# Altium PCB PCB_STM32F103C8T6.PcbDoc
Units mil, origin at the board's own origin, x right, y up, seen from the top; angles counter-clockwise.
Board outline 1250.01 x 2100.03 mil, 2 copper layers (Top Layer, Bottom Layer); 35 components, 52 nets, 165 pads, 35 vias.
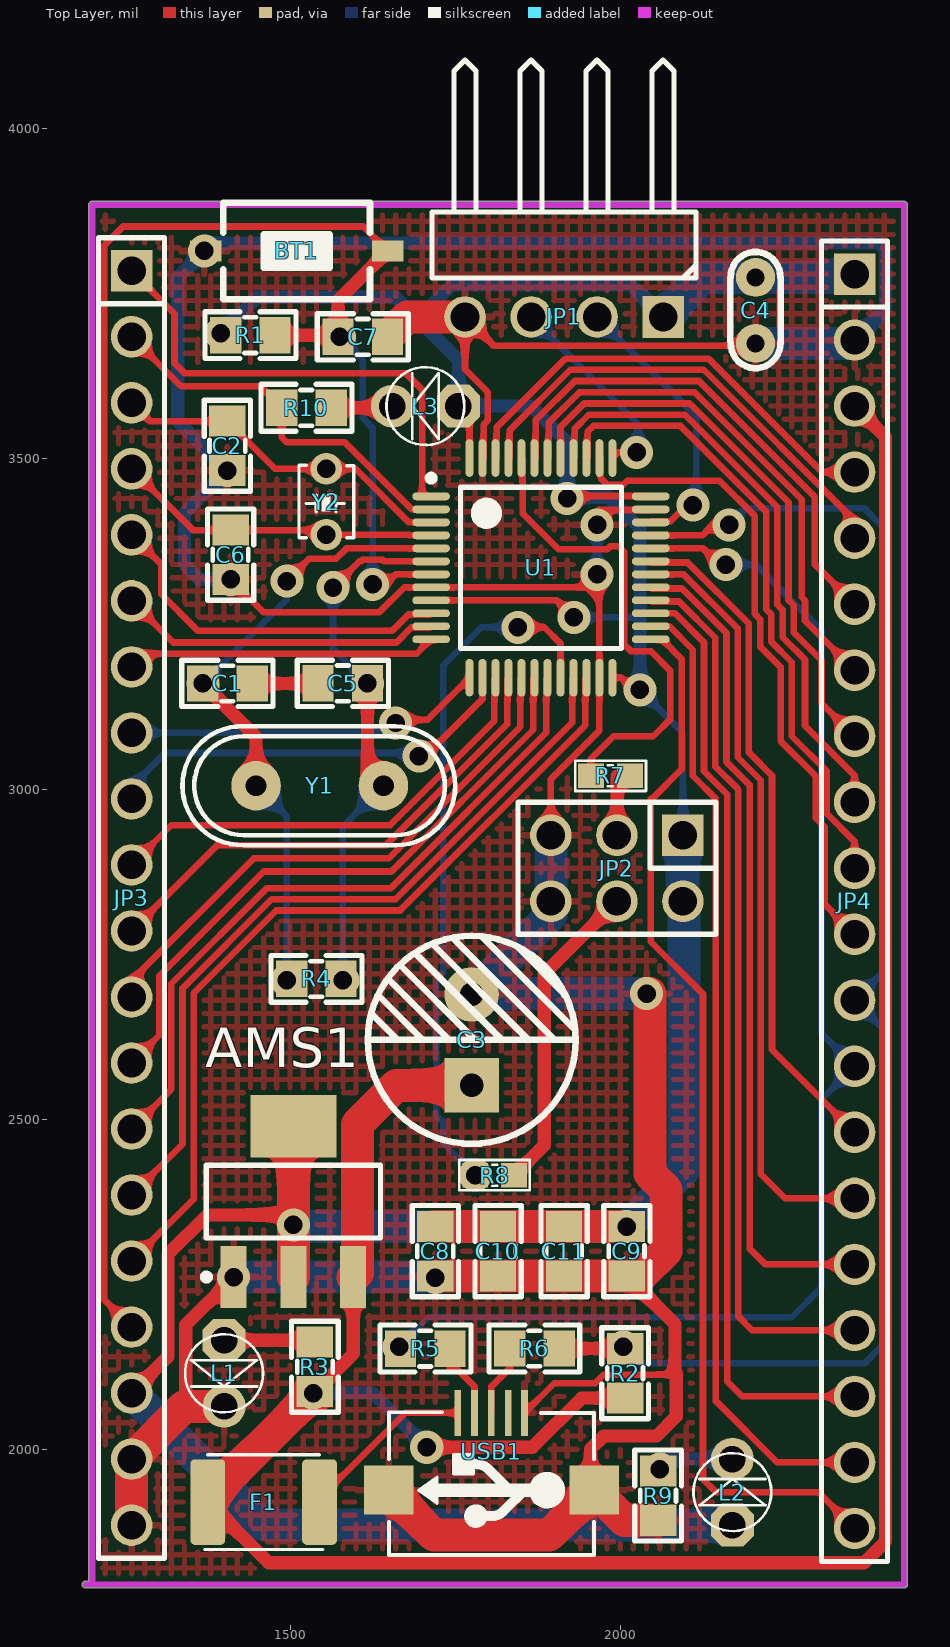
[diagram p0: Top Layer view]
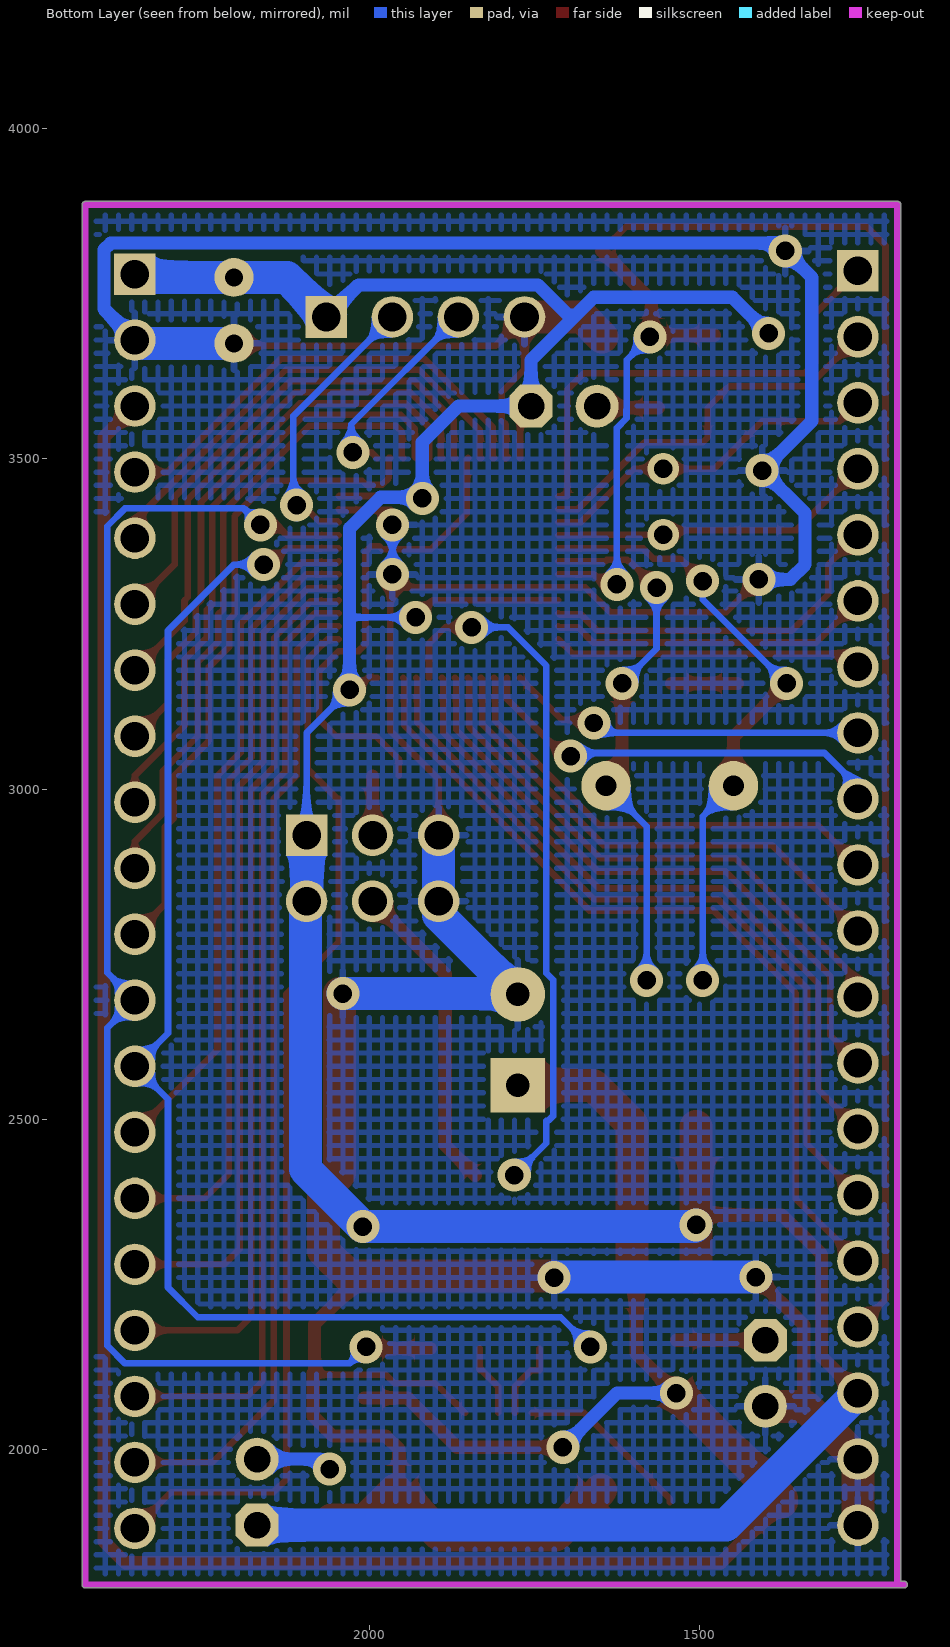
[diagram p1: Bottom Layer view, seen from below]
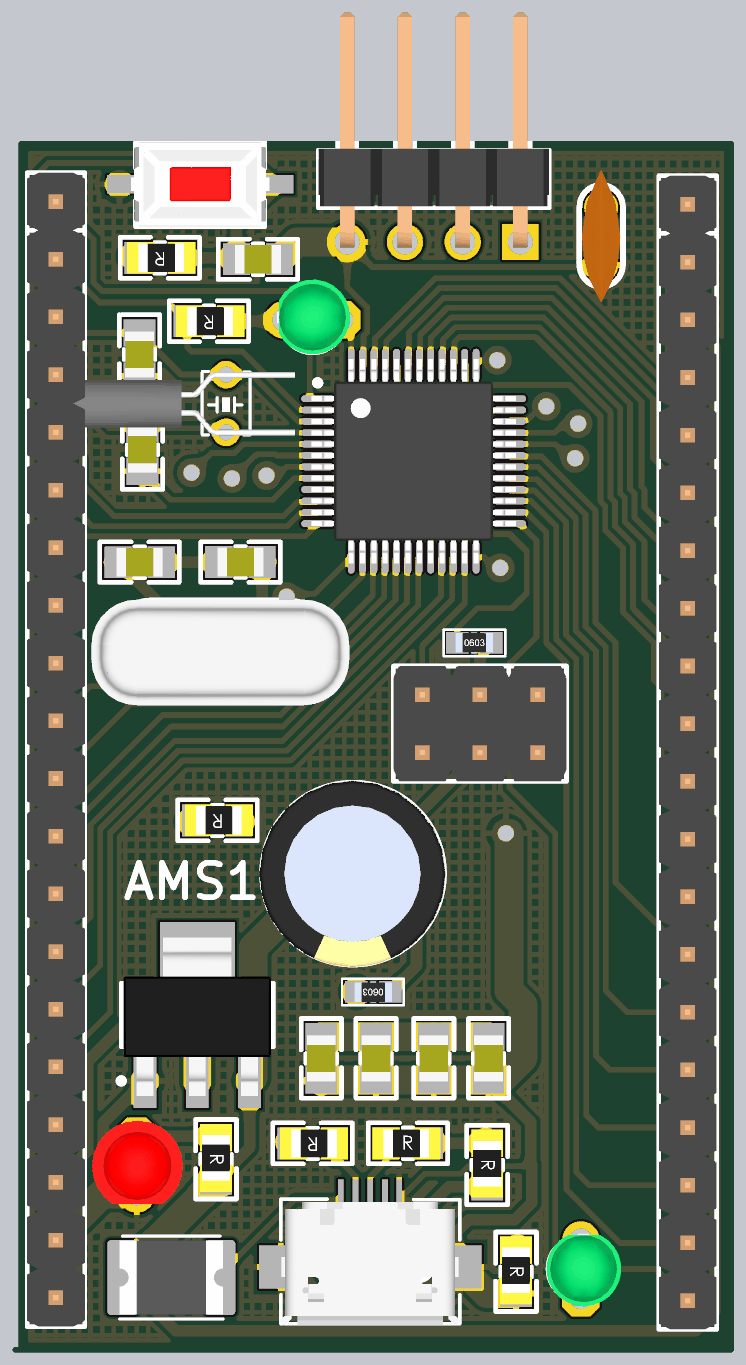
[diagram p2: 3D render of the assembled board from above, using the file's embedded part models]

## Layer stack, top to bottom
Top Solder: solder mask 0.4, Solder Resist, Dk 3.5
Top Layer: signal copper 1.4
Dielectric 1: dielectric 12.6, FR-4, Dk 4.8
Bottom Layer: signal copper 1.4
Bottom Solder: solder mask 0.4, Solder Resist, Dk 3.5

## Board outline
1190,1789.98 cw(c1190,1795) 1190,1800.02 1194.98,1800.02 1194.98,3885 cw(c1200,3885) 1200,3890.01 2430,3890.01 cw(c2430,3885) 2435.01,3885 2435.01,1795 cw(c2430,1795) 2430,1789.98

## Design rules (kind name [scope] priority, off if disabled: settings)
Clearance [All] p1: gap=7
DiffPairsRouting [All] p1: maxlimit=10 minlimit=10 mostfreqgap=10 toplayer_minwidth=10 toplayer_maxwidth=50 toplayer_prefwidth=20 bottomlayer_minwidth=10 bottomlayer_maxwidth=50 bottomlayer_prefwidth=20 maxuncoupledlength=500
PolygonConnect [All] p1: connectstyle=Relief reliefconductorwidth=10 reliefentries=4 polygonreliefangle="90 Angle" airgapwidth=10
RoutingVias [All] p1: holewidth=28 width=50 viastyle="Through Hole" minholewidth=28 minwidth=50 maxholewidth=28 maxwidth=50
SolderMaskExpansion [All] p1: expansion=4
Width [All] p1: maxlimit=50 minlimit=10 preferedwidth=20
29 further rules are at their usual default settings.

## Components (designator, comment, footprint, x,y, rotation, side; value= is the part's Value field where it differs from the comment)
AMS1 "AMS1117-3.3V" SOT223 1505,2375 r0 top
BT1 "Nut Nhan 2 Chan SMD 3x6x2.5" "Nut Nhan 2 Chan SMD 3x6x2.5" 1510,3815 r0 top
C1 "22pF" "tu 0805" 1405,3160 r0 top
C2 "22pF" "tu 0805" 1405,3520 r270 top
C3 "470uF" "tu hoa 8mm" 1775,2620 r90 top
C4 "104" "tu gom" 2205,3725 r270 top
C5 "22pF" "tu 0805" 1580,3160 r180 top
C6 "22pF" "tu 0805" 1410,3355 r270 top
C7 "104" "tu 0805" 1610,3685 r0 top
C8 "104" "tu 0805" 1720,2300 r270 top
C9 "104" "tu 0805" 2010,2300 r270 top
C10 "104" "tu 0805" 1815,2300 r270 top
C11 "104" "tu 0805" 1915,2300 r270 top
F1 "2A 24V" "Cau chi tu phuc hoi 2A 24V SMD1812" 1460,1920 r180 top
JP1 "JP 1x4 2.54" "JP 1x4 DC" 1715,3815 r180 top
JP2 "JP 2x3 2.54" "JP 2x3 DT" 1995,2880 r180 top
JP3 "JP 1x20 2.54" "JP 1x20 DT" 1260,3785 r270 top
JP4 "JP 1x20 2.54" "JP 1x20 DT" 2355,3780 r270 top
L1 "LED 3mm" LED-3MM-RED 1400,2165 r270 top
L2 "LED 3mm" LED-3MM-GREEN 2170,1885 r90 top
L3 "LED 3mm" LED-3MM-GREEN 1755,3580 r180 top
R1 "10k" "tro smd 0805" 1440,3685 r180 top
R2 "1.5k" "tro smd 0805" 2010,2115 r270 top
R3 "220R" "tro smd 0805" 1540,2125 r270 top
R4 "1M" "tro smd 0805" 1540,2710 r180 top
R5 "22R" "tro smd 0805" 1705,2150 r180 top
R6 "22R" "tro smd 0805" 1870,2155 r0 top
R7 "100k" "tro smd 0603" 1985,3020 r0 top
R8 "100k" "tro smd 0603" 1810,2415 r180 top
R9 "100R" "tro smd 0805" 2060,1930 r270 top
R10 "100R" "tro smd 0805" 1525,3575 r180 top
U1 "STM32F103xx_LQFP48" STM32_LQPF48 1880,3335 r0 top
USB1 "USB Micro 5p SMD" "USB Micro 5p SMD" 1805,2055 r180 top
Y1 "16Mhz" "Thach Anh 2 chan cam" 1545,3005 r0 top
Y2 "16Mhz" "Thach Anh 2 Chan 32,768 KHz" 1555,3385 r180 top

## Footprints (in the part's own frame and the unit in brackets; to place one, negate y for a bottom-side part, rotate by r counter-clockwise, add the part's x,y. Pads: shape width x height; smd on the part's side, far side on the other; paste and mask are expansions set on the pad)
"Cau chi tu phuc hoi 2A 24V SMD1812" [mm]
  rrect25% 1.34x3.29 smd: 1(-2.15,0) 2(2.15,0)
  silkscreen extent -2.28,-1.83 2.28,1.83, body extent -2.27,-1.62 2.27,1.62, height 1.25
"JP 1x4 DC" [mm] "4 pins, 1 row, right angled, gold plating"
  rect 1.6x1.6 hole 1.1: 1(-8.89,2.54)
  round 1.6 hole 1.1: 2(-6.35,2.54) 3(-3.81,2.54) 4(-1.27,2.54)
  silkscreen extent -10.16,-7.34 0,1.04, body extent -10.16,-7.57 0,2.79, height 2.54
"JP 1x20 DT" [mm] "20 pins, 1 row, straight, gold plating"
  rect 1.6x1.6 hole 1.1: 1(0,0)
  round 1.6 hole 1.1: 2(2.54,0) 3(5.08,0) 4(7.62,0) 5(10.16,0) 6(12.7,0) 7(15.24,0) 8(17.78,0) 9(20.32,0) 10(22.86,0) 11(25.4,0) 12(27.94,0) 13(30.48,0) 14(33.02,0) 15(35.56,0) 16(38.1,0) 17(40.64,0) 18(43.18,0) 19(45.72,0) 20(48.26,0)
  silkscreen extent -1.27,-1.27 49.53,1.27, body extent -1.27,-1.27 49.53,1.27, height 8.54
"JP 2x3 DT" [mm]
  rect 1.6x1.6 hole 1.1: 1(-2.54,-1.27)
  round 1.6 hole 1.1: 2(0,-1.27) 3(2.54,-1.27) 4(2.54,1.27) 5(0,1.27) 6(-2.54,1.27)
  silkscreen extent -3.81,-2.54 3.81,2.54, body extent -3.81,-2.54 3.81,2.54, height 8.55
LED-3MM-GREEN [mil]
  oct 65x65 hole 40: 1(0,0)
  round 65 hole 40: 2(100,0)
  silkscreen extent -9,-59 109,59, body extent -15,-70 112,60, height 182
LED-3MM-RED [mil]
  oct 65x65 hole 40: 1(0,0)
  round 65 hole 40: 2(100,0)
  silkscreen extent -9,-59 109,59, body extent -27,-77 117,80, height 181
"Nut Nhan 2 Chan SMD 3x6x2.5" [mm] "Switch SMD type"
  rect 1.2x0.8 smd: 1(-3.5,0) 2(3.5,0)
  silkscreen extent -2.82,-1.85 2.82,1.85, body extent -3.05,-1.85 3.05,1.85, height 2.5
SOT223 [mm]
  rect 1x2.4 smd: 1(-2.3,-2.9) 2(0,-2.9) 3(2.3,-2.9)
  rect 3.3x2.4 smd: 4(0,2.9)
  silkscreen extent -3.47,-3.02 3.35,1.4, body extent -3.25,-3.56 3.25,3.4, height 1.68
STM32_LQPF48 [mm]
  oval 1.45x0.3 smd: 1(-4.225,2.75) 2(-4.225,2.25) 3(-4.225,1.75) 4(-4.225,1.25) 5(-4.225,0.75) 6(-4.225,0.25) 7(-4.225,-0.25) 8(-4.225,-0.75) 9(-4.225,-1.25) 10(-4.225,-1.75) 11(-4.225,-2.25) 12(-4.225,-2.75) 25(4.225,-2.75) 26(4.225,-2.25) 27(4.225,-1.75) 28(4.225,-1.25) 29(4.225,-0.75) 30(4.225,-0.25) 31(4.225,0.25) 32(4.225,0.75) 33(4.225,1.25) 34(4.225,1.75) 35(4.225,2.25) 36(4.225,2.75)
  oval 0.3x1.45 smd: 13(-2.75,-4.225) 14(-2.25,-4.225) 15(-1.75,-4.225) 16(-1.25,-4.225) 17(-0.75,-4.225) 18(-0.25,-4.225) 19(0.25,-4.225) 20(0.75,-4.225) 21(1.25,-4.225) 22(1.75,-4.225) 23(2.25,-4.225) 24(2.75,-4.225) 37(2.75,4.225) 38(2.25,4.225) 39(1.75,4.225) 40(1.25,4.225) 41(0.75,4.225) 42(0.25,4.225) 43(-0.25,4.225) 44(-0.75,4.225) 45(-1.25,4.225) 46(-1.75,4.225) 47(-2.25,4.225) 48(-2.75,4.225)
  silkscreen extent -4.35,-3.1 3.1,3.57, body extent -4.5,-4.5 4.5,4.5, height 1.6
"Thach Anh 2 Chan 32,768 KHz" [mil]
  round 48 hole 28: 1(0,0) 2(0,-100)
  silkscreen extent -42,-106 42,5, body extent -120,-105 321,6, height 66
"Thach Anh 2 chan cam" [mm]
  round 1.905 hole 0.8: 1(-2.45,0) 2(2.45,0)
  silkscreen extent -5.28,-2.29 5.21,2.29, body extent -5.68,-2.36 5.68,2.29, height 3.5
"tro smd 0603" [mm] "Chip Capacitor, 2-Leads, Body 1,60x0,80mm, IPC Medium Density"
  rect 1x0.95 smd mask+0.076: 1(-0.75,0) 2(0.75,0)
  silkscreen extent -1.35,-0.58 1.37,0.58, body extent -0.82,-0.42 0.82,0.43, height 0.44
"tro smd 0805" [mm]
  rect 1.2x1.4 smd: 1(-0.946,-0.061) 2(0.954,-0.061)
  silkscreen extent -1.75,-0.97 1.75,0.84, body extent -1.56,-0.76 1.44,0.64, height 0.53
"tu 0805" [mm] "Compoment SMD 80x50mil"
  rect 1.2x1.4 smd: 1(-0.946,-0.003) 2(0.954,-0.003)
  silkscreen extent -1.75,-0.89 1.75,0.89, body extent -1.01,-0.64 1.01,0.63, height 0.61
"tu gom" [mm] "Tu gom mini"
  round 1.5 hole 0.7: 1(-1.27,0) 2(1.27,0)
  silkscreen extent -2.25,-0.97 2.22,0.97, body extent -2.92,-0.85 2.92,0.85, height 6.12
"tu hoa 8mm" [mm]
  rect 2.1x2.1 hole 0.9: 1(-1.75,0)
  round 2.1 hole 0.9: 2(1.75,0)
  silkscreen extent -4,-4 4,4, body extent -4.1,-4.07 4.1,4.13, height 13.81
"USB Micro 5p SMD" [mil]
  rect 10x70 smd: 1(51.18,0) 2(25.59,0) 3(0,0) 4(-25.59,0) 5(-50,0)
  rect 74.8x74.8 smd: 5(-155.51,116.84) 5(155.51,116.84)
  silkscreen extent -155,-1 155,215, body extent -157,5 158,218, height 107

## Part data
AMS1: library part "AMS1117 SMD", "Dán"
C1 C2 C5 C6: library part "Tu 0805 22pF 50V 10%", "Dán"
C3: library part "Tu Hoa 470uF 16V 8x11", "C?m"
C4: library part "Tu gom 104 50V", "C?m"
C7 C8 C9 C10 C11: library part "Tu 0805 104 50V 10%", "Dán"
F1: library part "Cau chi tu phuc hoi 2A 24V SMD1812", "2A 24V SMD1812"
JP1: library part "JP 1x4 2.54 Duc Cong", "C?m"
JP2: library part "JP 2x3 2.54 Duc Thang", "C?m"
JP3 JP4: library part "JP 1x20 2.54 Duc Thang", "C?m"
L1: library part "LED 3mm Do", "C?m"
L2 L3: library part "LED 3mm Xanh La", "C?m"
R1: library part "Tro 0805 1% 10k", "Dán"
R2: library part "Tro 0805 5% 1.5k", "Dán"
R3: library part "Tro 0805 5% 220R", "Dán"
R4: library part "Tro 0805 5% 1M", "Dán"
R5 R6: library part "Tro 0805 5% 22R", "Dán"
R7 R8: library part "Tro 0603 5% 100k", "Dán"
R9 R10: library part "Tro 0805 5% 100R", "Dán"
USB1: "USB Type B"
Y1: library part "Thach Anh 2 chan Cam", "Crystal For all Crystal 2pin."
Y2: library part "Thach Anh 2 chan 32,768 Khz", "Crystal For all Crystal 2pin."

## Via types
v1: diameter 50, hole 28, Top Layer to Bottom Layer, tented both sides, 35 vias

## Nets (pads, with @x,y where several pads share a name; then routed paths per layer and width w, separated by ;. In a path a pad name is that pad's centre, name@x,y a point inside that pad or via, vN(x,y) a via of type N, cw(c..) or ccw(c..) an arc to the next point about the centre after c; other vN are vias at no path point)
5V: AMS1.3 C3.1 F1.2 JP4.3 R2.2 R3.2 | length 4214.5
  Top Layer w20: F1.2 1467.35,1828 2369.36,1828 2401.92,1860.56 2401.92,3533.08 JP4.3 ; R3.2 1538.03,2087.43 1595.55,2144.95 AMS1.3 ; v1(1707,2003) 1867.04,2003 1941.47,2077.43 R2.2
  Top Layer w50: F1.2 1375.35,1925.17 R3.2@1535.09,2084.91 ; AMS1.3 1601.96,2267.24 1601.96,2491.96 1661.1,2551.1 C3.1
  Bottom Layer w20: v1(1535,2085) 1625,2085 v1(1707,2003)
BOOT0: R7.1 U1.44 | length 737.1
  Top Layer w10: U1.44 1852.25,3499.56 1852.25,3417.75 1907,3363 1980.33,3363 1985.33,3368 1997,3368 2005.8,3359.2 2005.8,3219.32 2016.28,3208.83 2046.17,3208.83 2076,3179 2076,3106 2050,3080 1990,3080 1955.47,3045.47 R7.1
BOOT1: R8.2 U1.20 | length 1066.8
  Top Layer w10: v1(1845,3245) 1885,3245 1909.53,3220.47 U1.20 U1.20@1910,3169.13
  Bottom Layer w10: v1(1780.47,2415) 1732,2463.47 1732,2497.76 1728.69,2497.76 1721.66,2504.79 1721.66,2710.99 1732,2721.33 1732,3187 1790,3245 v1(1845,3245)
GND: AMS1.1 BT1.1 C2.2 C3.2 C4.2 C6.2 C7.2 C8.2 C9.2 C10.2 C11.2 JP1.4 JP2.3 JP2.4 JP3.19 JP3.20 JP4.2 L1.2 R9.2 U1.8 U1.23 U1.35 U1.47 USB1.5 | length 7363.8
  Top Layer w10: v1(1409.87,3317.43) 1459.29,3268 1635.33,3268 1672.8,3305.47 U1.8 1949.53,3305.47 1968.58,3286.42 ; U1.47@1793.2,3500.43 1790.51,3503.12 1793.2,3503.12 1793.2,3551.99 1799.5,3558.29 1799.5,3601.22 1765,3635.72 JP1.4 1808.5,3671.5 2201.5,3671.5 C4.2 ; USB1.5@1855,2055 1900,2100 1962.03,2100 1975.08,2113.05 2083.05,2113.05 2085,2115 ; JP2.3 1895,3015 1968.58,3088.58 U1.23 1968.58,3286.42 ; v1(1965,3325) 1965,3337.83 1967.17,3340 1968.58,3338.58 1968.58,3286.42 ; v1(1965,3400) 1965,3420 1967.68,3422.68 2045.43,3422.68 U1.35
  Top Layer w20: 1340,2065 1342,2067 1342,2188.38 v1(1414.45,2260.83) ; C6.2@1409.45,3317.43 v1(1409.87,3317.43) ; USB1.5@1960.51,1938.16 1955,1943.67 1955,2000 1975,2020 2055,2020 2085,2050 2085,2115 ; C9.2 2083.05,2189.24 2083.05,2113.05
  Top Layer w50: JP3.20 JP3.19 1340,2065 L1.2 ; C7.2 1677.71,3715 JP1.4 ; USB1.5@1649.49,1938.16 1717.65,1870 1892.35,1870 1960.51,1938.16 2006.24,1892.43 R9.2 ; C8.2@1725,2262.43 C10.2 C11.2 C9.2 2031.5,2262.43 2069.43,2300.35 2069.43,2392.85 2045,2417.28 2045,2690 v1(2040,2690)
  Bottom Layer w10: v1(1965,3325) v1(1965,3400)
  Bottom Layer w20: v1(1409.87,3317.43) 1362.57,3317.43 1340,3340 1340,3417.56 v1(1404.87,3482.43) 1330,3557.29 1330,3775 v1(1370,3815) 1381.92,3826.92 2391.96,3826.92 2401.92,3816.96 2401.92,3726.92 JP4.2
  Bottom Layer w50: v1(1414.45,2260.83) 1719.17,2260.83 v1(1720,2260) ; C3.2 C3.2@1776.1,2690 ; JP2.3 JP2.4 1895,2808.9 C3.2@1776.1,2690 ; v1(2040,2690) C3.2@1776.1,2690 ; C4.2 2350,3675 JP4.2
NetC1_2: C1.2 C5.2 | length 99.6
  Top Layer w20: C1.2 C5.2@1542.16,3159.87
NetF1_1: F1.1 USB1.1 | length 268.1
  Top Layer w10: F1.1 1544.65,1925.09 1674.56,2055 USB1.1
NetJP2_2: JP2.2 R7.2 | length 89.5
  Top Layer w20: JP2.2 R7.2@1995,3019.53
NetJP2_5: JP2.5 R8.1 | length 479.4
  Top Layer w20: R8.1 1885,2460.47 1885,2720 JP2.5
NetL1_1: L1.1 R3.1 | length 134.8
  Top Layer w20: L1.1 R3.1@1534.83,2165
NetL2_2: L2.2 R9.1 | length 116.2
  Bottom Layer w20: v1(2060,1970) 2075,1985 L2.2
NetL3_2: L3.2 R10.1 | length 93.9
  Top Layer w20: R10.1 1652.39,3577.39 L3.2
NetR5_1: R5.1 USB1.2 | length 120
  Top Layer w10: R5.1 1742.23,2119.83 1754.57,2119.83 1779.41,2095 USB1.2
NetR6_1: R6.1 USB1.3 | length 110.7
  Top Layer w10: USB1.3 1805,2095 1830.05,2120.05 1832.77,2120.05 R6.1
OSC_IN: C1.1 R4.2 U1.5 Y1.1 | length 959.8
  Top Layer w10: v1(1367.77,3159.87) C1.1@1375,3167.09 ; v1(1495,3315) 1529,3349 1569.91,3349 1585.44,3364.53 U1.5
  Top Layer w20: v1(1367.77,3159.87) 1401.95,3125.69 1401.95,3125.27 1448.54,3078.67 Y1.1
  Bottom Layer w10: v1(1367.77,3159.87) 1495,3287.09 v1(1495,3315) ; Y1.1 1495,2958.54 v1(1495,2710)
OSC_OUT: C5.1 R4.1 U1.6 Y1.2 | length 836.4
  Top Layer w10: v1(1565,3305) 1604.84,3344.84 1607.52,3344.84 1609.67,3347 1640.33,3347 1642.48,3344.84 1680.12,3344.84 U1.6 ; C5.1@1599.87,3160.13 v1(1617.23,3160.13)
  Top Layer w20: v1(1617.23,3160.13) 1617.23,3029.23 Y1.2
  Bottom Layer w10: v1(1565,3305) 1565,3212.36 v1(1617.23,3160.13) ; v1(1580,2710) 1580,2943.54 Y1.2
PA0: JP3.5 U1.10 | length 550.9
  Top Layer w10: JP3.5 1305,3340 1305,3295 1360,3240 1654.93,3240 1679.25,3264.32 1711.88,3264.32 U1.10
PA1: JP3.6 U1.11 | length 489.9
  Top Layer w10: JP3.6 1323,3222 1660.97,3222 1683.61,3244.64 1711.88,3244.64 U1.11
PA2: JP3.7 U1.12 | length 470.9
  Top Layer w10: JP3.7 1280,3205 1691.93,3205 U1.12
PA3: JP3.8 U1.13 | length 549.3
  Top Layer w10: v1(1660,3100) 1660,3105 1708.07,3105 U1.13
  Bottom Layer w10: JP3.8 1645,3085 v1(1660,3100)
PA4: JP3.9 U1.14 | length 641.2
  Top Layer w10: v1(1695,3050) 1705,3050 1791.42,3136.42 U1.14
  Bottom Layer w10: JP3.9 1260,3004 1310.5,3054.5 1690.5,3054.5 v1(1695,3050)
PA5: JP3.10 U1.15 | length 706.1
  Top Layer w10: JP3.10 1320,2945 1651.46,2945 1809.32,3102.86 1809.32,3166.88 U1.15
PA6: JP3.11 U1.16 | length 769.8
  Top Layer w10: JP3.11 1390,2915 1645.5,2915 1829.01,3098.51 1829.01,3166.88 U1.16
PA7: JP3.12 U1.17 | length 848.1
  Top Layer w10: JP3.12 1260,2710 1445,2895 1649.54,2895 1848.69,3094.15 1848.69,3166.88 U1.17
PA8: JP4.16 U1.29 | length 1258.9
  Top Layer w10: U1.29 2048.12,3303.69 2093.43,3303.69 2161,3236.12 2161,3041.12 2196,3006.12 2196,2304 2220,2280 JP4.16
PA9: JP4.15 U1.30 | length 1163.6
  Top Layer w10: U1.30 2096.01,3325.16 2178,3243.17 2178,3048.17 2213,3013.17 2213,2417 2250,2380 JP4.15
PA10: JP4.14 U1.31 | length 1024.3
  Top Layer w10: U1.31 2048.12,3343.06 2102.14,3343.06 2195,3250.21 2195,3055.21 2230,3020.21 2230,2605 JP4.14
PA15: JP4.11 U1.38 | length 990.5
  Top Layer w10: U1.38 1970.36,3501.34 1970.36,3471.28 1980.85,3460.8 2004.51,3460.8 2010.72,3467 2150.33,3467 2204,3413.33 2204,3265.25 2212,3257.25 2212,3215.88 2243,3184.88 2243,3072.96 2296.08,3019.88 2296.08,2955.59 2310,2941.67 2310,2825 JP4.11
PB0: JP3.13 U1.18 | length 949.8
  Top Layer w10: JP3.13 1301.92,2626.92 1301.92,2716.92 1460,2875 1653.58,2875 1868.38,3089.79 1868.38,3166.88 U1.18
PB1: JP3.14 U1.19 | length 1054.5
  Top Layer w10: JP3.14 1320,2545 1320,2705 1465,2850 1652.63,2850 1888.06,3085.44 1888.06,3166.88 U1.19
PB3: JP4.10 U1.39 | length 964.1
  Top Layer w10: U1.39 1950.68,3503.12 1950.68,3541.18 1959.5,3550 2091.37,3550 2221,3420.37 2221,3272.29 2229,3264.29 2229,3222.92 2260,3191.92 2260,3080 2313.08,3026.92 2313.08,2962.64 2355,2920.71 JP4.10
PB4: JP4.9 U1.40 | length 914.5
  Top Layer w10: U1.40 1930.99,3503.12 1930.99,3545.53 1952.46,3567 2098.41,3567 2238,3427.41 2238,3279.33 2246,3271.33 2246,3229.96 2280,3195.96 2280,3095.71 2355,3020.71 JP4.9
PB5: JP4.8 U1.41 | length 864.9
  Top Layer w10: U1.41 1909.53,3548.11 1945.42,3584 2105.45,3584 2255,3434.45 2255,3286.37 2263,3278.37 2263,3237 2305,3195 2305,3130 JP4.8
PB6: JP4.7 U1.42 | length 816.4
  Top Layer w10: U1.42 1891.62,3501.34 1891.62,3554.25 1938.37,3601 2112.49,3601 2275,3438.49 2275,3290.42 2280,3285.42 2280,3255 JP4.7
PB7: JP4.6 U1.43 | length 766.8
  Top Layer w10: U1.43 1871.94,3501.34 1871.94,3558.6 1931.33,3618 2119.53,3618 2295,3442.53 2295,3340 JP4.6
PB8: JP4.5 U1.45 | length 725.3
  Top Layer w10: U1.45 1832.57,3501.34 1832.57,3543.28 1924.29,3635 2126.58,3635 2355,3406.58 JP4.5
PB9: JP4.4 U1.46 | length 704.7
  Top Layer w10: U1.46 1812.88,3501.34 1812.88,3547.63 1917.25,3652 2133.62,3652 2305.62,3480 JP4.4
PB10: JP3.15 U1.21 | length 1170.8
  Top Layer w10: JP3.15 1337,2462 1337,2697.96 1472.04,2833 1659.67,2833 1927.43,3100.77 1927.43,3166.88 U1.21
PB11: JP3.16 U1.22 | length 1278.9
  Top Layer w10: JP3.16 1354,2379 1354,2690.92 1479.08,2816 1666.71,2816 1947.12,3096.41 1947.12,3166.88 U1.22
PB12: JP4.20 U1.25 | length 1614.9
  Top Layer w10: U1.25 2063.27,3226.73 2093,3197 2093,3030 2048,2985 2046.34,2985 2046.34,2768.66 2125.5,2689.5 2125.5,1954.5 2145,1935 2300,1935 JP4.20
PB13: JP4.19 U1.26 | length 1479.4
  Top Layer w10: U1.26 2074.61,3246.42 2110,3211.03 2110,3020 2145,2985 2145,2072.93 2237.93,1980 JP4.19
PB14: JP4.18 U1.27 | length 1435
  Top Layer w10: U1.27 2082.94,3266.1 2127,3222.04 2127,3027.04 2162,2992.04 2162,2103 2185,2080 JP4.18
PB15: JP4.17 U1.28 | length 1348.4
  Top Layer w10: U1.28 2048.12,3284.01 2089.08,3284.01 2144,3229.08 2144,3034.08 2179,2999.08 2179,2201 2200,2180 JP4.17
PC13: JP3.2 R10.2 U1.2 | length 588.2
  Top Layer w10: JP3.2 1335,3610 1454.82,3610 R10.2 1487.43,3532.57 1495,3525 1583.06,3525 1684.47,3423.58 U1.2
PC14: C2.1 JP3.3 U1.3 Y2.2 | length 528.7
  Top Layer w10: JP3.3 1287.77,3557.23 C2.1 1477.09,3485 Y2.2 1599.02,3485 1680.12,3403.9 U1.3
PC15: C6.1 JP3.4 U1.4 Y2.1 | length 495.4
  Top Layer w10: JP3.4 1352.77,3392.23 C6.1 1547.77,3392.23 Y2.1 1679.33,3385 1680.12,3384.21 U1.4
RESET: BT1.2 C7.1 JP3.17 R1.1 U1.7 | length 2861.3
  Top Layer w10: JP3.17 1218.08,2226.92 1218.08,3823.08 1247,3852 1610.8,3852 BT1.2 ; v1(1625,3310) 1635,3310 1640,3305 1660.16,3325.16 U1.7
  Top Layer w20: R1.1 C7.1@1570.24,3687.39 ; C7.1@1572.77,3685 1572.77,3739.98 BT1.2
  Bottom Layer w10: v1(1575,3685) 1610,3650 1610,3575 1610.5,3574.5 1610.5,3561.57 1625,3547.07 v1(1625,3310)
SWCLK: JP1.3 U1.37 | length 328.7
  Top Layer w10: U1.37 1996.93,3510 v1(2025,3510)
  Bottom Layer w10: JP1.3 2027.5,3552.5 2027.5,3512.5 v1(2025,3510) v1@2025,3525
SWDIO: JP1.2 U1.34 | length 441.6
  Top Layer w10: U1.34 2048.12,3405.68 2076.39,3405.68 2100.72,3430 v1(2110,3430)
  Bottom Layer w10: JP1.2 2115,3565 v1@2115,3430 ; v1@2110,3410 v1(2110,3430)
USB_D+: JP4.12 R2.1 R6.2 U1.33 | length 2169.5
  Top Layer w10: U1.33 2124.21,3384.21 2145,3405 2150,3400 v1(2165,3400)
  Top Layer w20: R6.2 R2.1@2005,2152.61
  Bottom Layer w10: v1(2005,2155) 2030,2130 2370,2130 2396.92,2156.92 2396.92,2638.08 JP4.12 2396.92,2721.92 2396.92,3398.08 2370,3425 2190,3425 v1(2165,3400)
USB_D-: JP4.13 R5.2 U1.32 | length 2023.9
  Top Layer w10: U1.32 2125.47,3364.53 2150,3340 v1(2160,3340)
  Bottom Layer w10: v1(1665,2155) 1710,2200 2260,2200 2305,2245 2305,2530 JP4.13 2305,2630 2305,3240 2205,3340 v1(2160,3340)
VBAT: JP3.1 U1.1 | length 733.9
  Top Layer w10: JP3.1 1325,3720 1325,3645 1340,3630 1675,3630 1700,3605 1700,3443.27 U1.1
VCC_3V3: AMS1.2 AMS1.4 C4.1 C8.1 C9.1 C10.1 C11.1 JP1.1 JP2.1 JP2.6 JP3.18 JP4.1 L2.1 L3.1 R1.2 U1.9 U1.24 U1.36 U1.48 | length 5827
  Top Layer w10: U1.9 1904.21,3285.79 v1(1930,3260) ; L3.1 1771.73,3563.27 U1.48 ; v1@1915,3425 v1@1919.69,3429.7 ; v1(1919.69,3440.3) v1@1919.69,3429.7 ; U1.24 2001.34,3168.66 2020,3150 v1(2030,3150) ; U1.36 2045.81,3443.8 1933.8,3443.8 v1@1919.69,3429.7
  Top Layer w20: JP3.18 1315,2140 1315,2295 1375,2355 v1@1505,2355 ; 1505,2395 1505,2400
  Top Layer w50: AMS1.2 v1(1505,2340) 1505,2355 1505,2395 ; 1505,2400 AMS1.4 ; C8.1 C10.1 C11.1 v1(2009.87,2337.23)
  Bottom Layer w10: v1(1930,3260) 2030,3260 ; v1(2030,3150) 2095,3085 JP2.1
  Bottom Layer w20: v1(1395,3690) 1450,3745 1660,3745 1687.5,3717.5 ; v1(2030,3150) 2030,3260 2030,3395 1983,3442 1921.39,3442 v1(1919.69,3440.3) 1919.69,3525.3 1865,3580 L3.1 1755,3650 1687.5,3717.5 ; JP1.1 2016.5,3763.5 1744.91,3763.5 1698.92,3717.5 1687.5,3717.5
  Bottom Layer w50: JP3.18 1460,1885 L2.1 ; v1(1505,2340) 1507.77,2337.23 v1(2009.87,2337.23) 2097,2424.36 2097,2828 JP2.6 JP2.1 ; JP1.1 2125,3775 C4.1 2350,3775 JP4.1
pads on no net: USB1.4

## Polygon pours and split planes (outlines as drawn)
GND on Top Layer "TOP POLY" (hatched 90Degree grid 20 track 8, remove dead copper, pour order 0): 1200,3885 2430,3885 2430,1795 1200,1795 1200,3885
GND on Bottom Layer "BOT POLY" (hatched 90Degree grid 20 track 8, remove dead copper, pour order 2): 1200,3885 2430,3885 2430,1795 1190,1795 1190,3875 1200,3885

## Keep-outs
Keep-Out Layer:
  lines w10: 2430,3865 2430,3885 ; 2430,3885 2430,1810 2430,1795 1190,1795 1200,1795 1200,3885 2430,3885